# EAGLE board Lock (EAGLE 9.3.0)
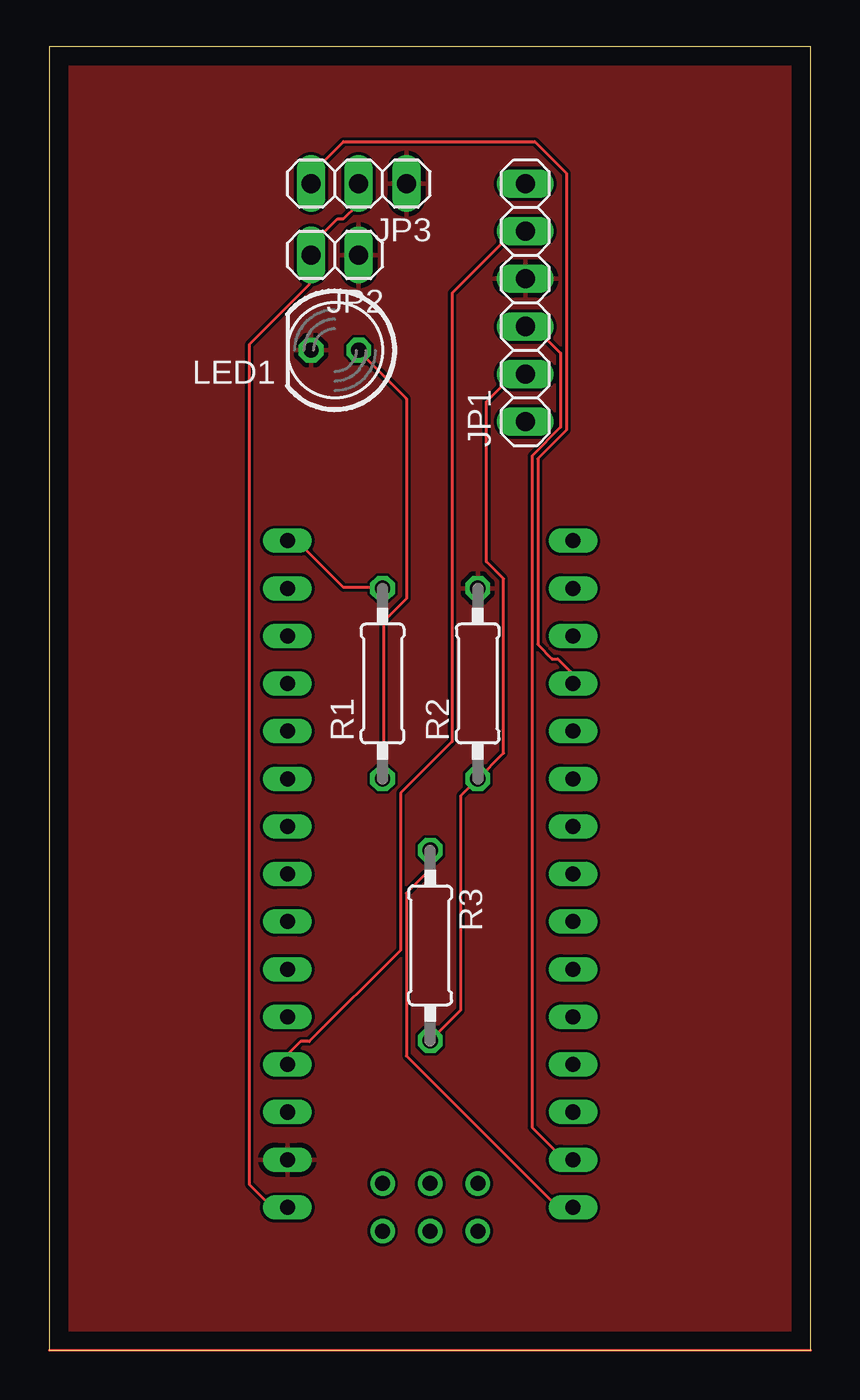
[diagram p0: board, top side]

Size 40.62 x 69.52 mm. Coordinates in mm from the lower left corner, seen from the top.
Outline: 0,0 40.62,0 40.62,69.52 0,69.52 0,0
Copper layers (1*16): Top 0.035mm / dielectric 1.5mm / Bottom 0.035mm
Design rules "default": minimum track width 6mil, minimum drill 0.35mm, track to track 6mil, track to pad 6mil, pad to pad 6mil, via to via 6mil, smd to smd 6mil, copper to edge 40mil, drill to drill 6mil, minimum pad ring 10mil, minimum via ring 8mil, stop-mask expansion 4mil, vias tented up to drill 0mil, thermal gap 10mil

## Footprints (pad centres in the part's own frame; a part is rotated, then mirrored left to right if it is on the bottom)
1X06 = drill 1.016 long: 1 -6.35,0; 2 -3.81,0; 3 -1.27,0; 4 1.27,0; 5 3.81,0; 6 6.35,0
1X02 = drill 1.016 long: 1 -1.27,0; 2 1.27,0
1X03 = drill 1.016 long: 1 -2.54,0; 2 0,0; 3 2.54,0
LED5MM = drill 0.813 octagon: A -1.27,0; K 1.27,0
0207/10 = drill 0.813 octagon: 1 -5.08,0; 2 5.08,0
NANO = drill 0.8 long: 3.3V -10.16,24.13; 5V -10.16,-1.27; A0 -10.16,19.05; A1 -10.16,16.51; A2 -10.16,13.97; A3 -10.16,11.43; A4 -10.16,8.89; A5 -10.16,6.35; A6 -10.16,3.81; A7 -10.16,1.27; AREF -10.16,21.59; D2 5.08,1.27; D3 5.08,3.81; D4 5.08,6.35; D5 5.08,8.89; D6 5.08,11.43; D7 5.08,13.97; D8 5.08,16.51; D9 5.08,19.05; D10 5.08,21.59; D11 5.08,24.13; D12 5.08,26.67; D13 -10.16,26.67; GND -10.16,-6.35; GND1 5.08,-1.27; RAW -10.16,-8.89; RST -10.16,-3.81; RST1 5.08,-3.81; RX1 5.08,-6.35; TX0 5.08,-8.89 | drill 0.8: ICSP1 -5.08,-10.16; ICSP2 -5.08,-7.62; ICSP3 -2.54,-10.16; ICSP4 -2.54,-7.62; ICSP5 0,-10.16; ICSP6 0,-7.62

## Placement (x,y rotation side)
JP1  [1X06]  25.4,55.88 90 top
JP2  [1X02]  15.24,58.42 180 top
JP3  [1X03]  16.51,62.23 180 top
LED1  [LED5MM]  15.24,53.34 180 top
R1  220  [0207/10]  17.78,35.56 90 top
R2  2k  [0207/10]  22.86,35.56 90 top
R3  1k  [0207/10]  20.32,21.59 270 top
U$1  NANO  [NANO]  22.86,16.51 0 top

## Library data of the parts
JP1-JP3 = pinhead
LED1 = led
R1-R3 = rcl; SPICEPREFIX: R
U$1 = Arduino-clone

## Nets
+5V: JP1.5 U$1.5V
GND: JP1.4 JP2.1 JP3.1 LED1.K R2.2 U$1.GND
N$1: JP1.3 U$1.RX1
N$2: R3.1 U$1.TX0
N$3: JP1.2 R2.1 R3.2
N$7: R1.2 U$1.D13
N$8: LED1.A R1.1
N$9: JP3.3 U$1.D9
VCC: JP2.2 JP3.2 U$1.RAW

## Tracks (layer width: path | path; a pad name or v marks a point on that pad's centre or on a via)
+5V
  Top 0.152: U$1.5V 12.8,15.24 12.8,15.85 13.41,16.46 13.87,16.46 18.75,21.34 18.75,29.72 21.49,32.46 21.49,56.39 24.69,59.59 25.3,59.59 JP1.5
GND
  pour Top: 0,0 40.64,0 40.64,69.85 0,69.85
N$1
  Top 0.152: U$1.RX1 27.89,10.21 27.43,10.21 25.76,11.89 25.76,47.7 27.28,49.23 27.28,53.19 25.91,54.56 25.45,54.56 JP1.3
N$2
  Top 0.152: U$1.TX0 27.13,7.62 19.05,15.7 19.05,24.38 20.27,25.6 20.27,26.67 R3.1
N$3
  Top 0.152: R3.2 21.95,18.14 21.95,29.57 R2.1 24.23,31.85 24.23,41.15 23.32,42.06 23.32,50.6 24.69,51.97 25.3,51.97 JP1.2
N$7
  Top 0.152: U$1.D13 12.8,43.13 13.26,43.13 15.7,40.69 17.68,40.69 R1.2
N$8
  Top 0.152: R1.1 17.83,30.48 17.83,38.86 19.05,40.08 19.05,50.75 16.46,53.34 LED1.A
N$9
  Top 0.152: U$1.D9 27.89,35.66 27.89,36.12 27.13,36.88 26.82,36.88 26.06,37.64 26.06,47.55 27.58,49.07 27.58,62.79 25.91,64.47 15.7,64.47 14.02,62.79 14.02,62.33 JP3.3
VCC
  Top 0.152: U$1.RAW 11.89,7.62 10.67,8.84 10.67,53.65 13.87,56.84 13.87,58.37 JP2.2 14.02,58.52 14.02,58.98 15.39,60.35 15.7,60.35 16.46,61.11 16.46,62.18 JP3.2
(copper drawn outside any net)
  shapes: Top area x1